# Altium PCB 584689669.PcbDoc
Units mil, origin at the board's own origin, x right, y up, seen from the top; angles counter-clockwise.
Board outline 10050.86 x 1968.36 mil, 2 copper layers (Top Layer, Bottom Layer); 121 components, 55 nets, 447 pads, 141 vias.
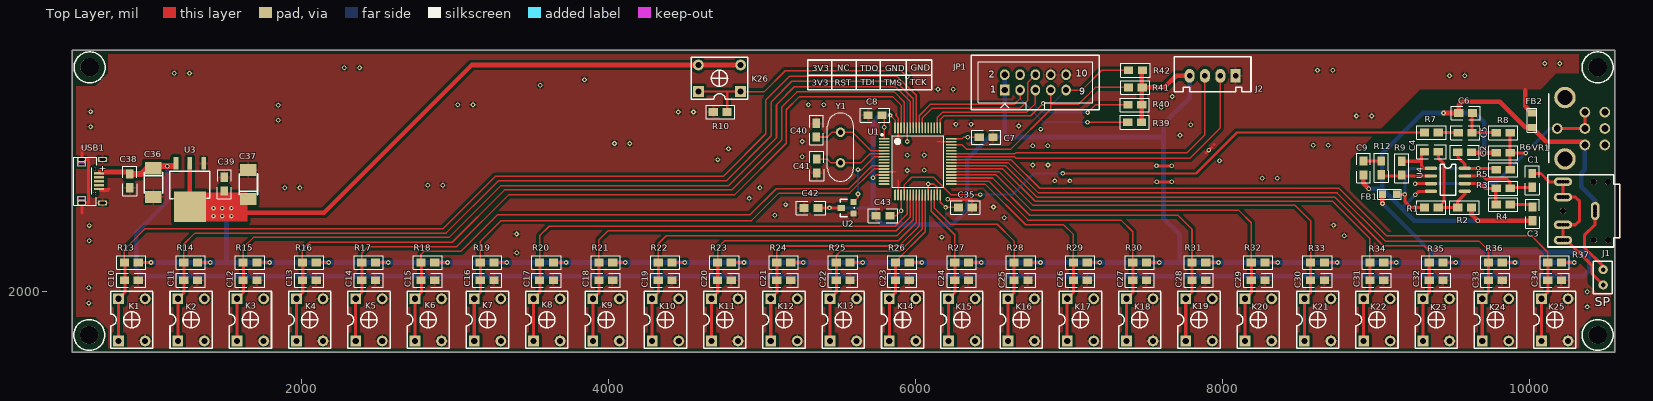
[diagram p0: Top Layer view]
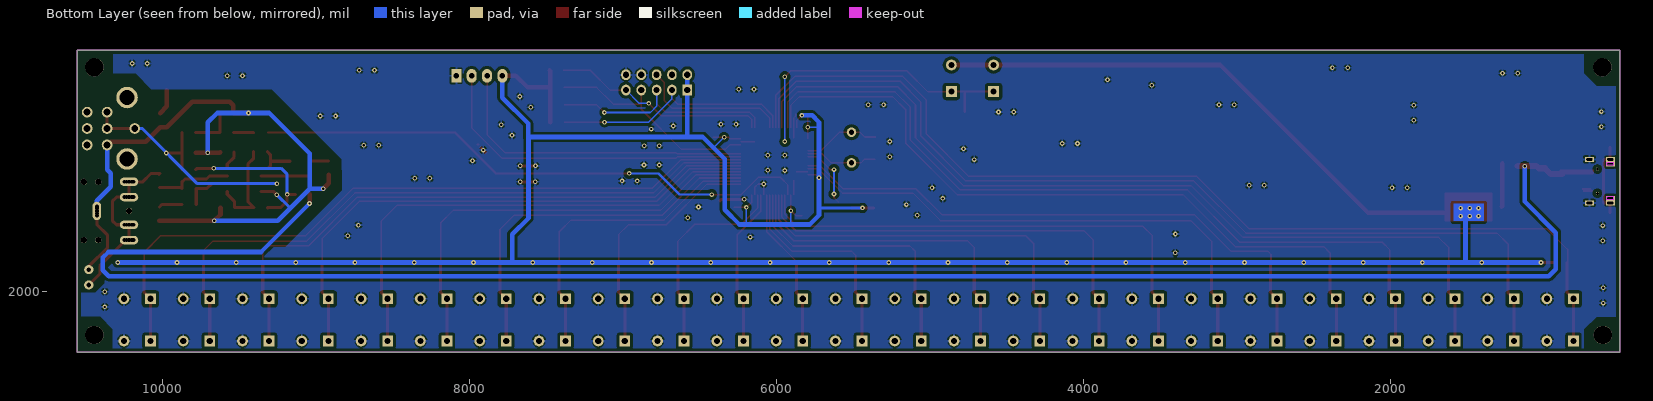
[diagram p1: Bottom Layer view, seen from below]
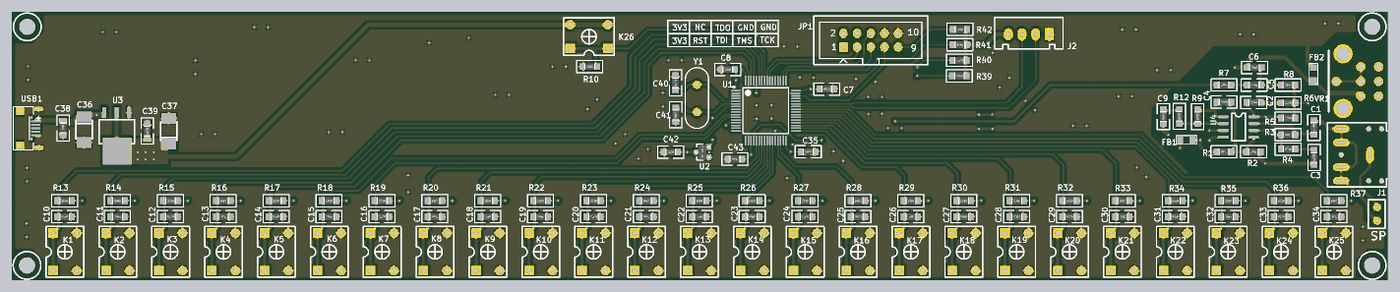
[diagram p2: 3D render of the assembled board from above, using the file's embedded part models]

## Layer stack, top to bottom
Top Solder: solder mask 0.4, Solder Resist, Dk 3.5
Top Layer: signal copper 1.4
Dielectric 1: dielectric 12.6, FR-4, Dk 4.8
Bottom Layer: signal copper 1.4
Bottom Solder: solder mask 0.4, Solder Resist, Dk 3.5

## Board outline
505.89,1606 505.89,3574.36 10556.75,3574.36 10556.75,1606

## Design rules (kind name [scope] priority, off if disabled: settings)
Clearance [All] p1: gap=8 ignorepadtopadclearanceinfootprint=FALSE
HoleSize [All] p1: absolutevalues=TRUE maxlimit=300 minlimit=1 maxpercent=80.000 minpercent=20.000
HoleToHoleClearance [All] p1 off: gap=10 allowstackedmicrovias=TRUE
MinimumSolderMaskSliver [All] p1 off: minsoldermaskwidth=10
PolygonConnect [All] p1: connectstyle=Relief reliefconductorwidth=15 reliefentries=4 polygonreliefangle="90 Angle" airgapwidth=10
RoutingVias [All] p1: holewidth=28 width=50 viastyle="Through Hole" minholewidth=28 minwidth=50 maxholewidth=28 maxwidth=50
SilkToSilkClearance [All] p1 off: silktosilkclearance=10
SilkToSolderMaskClearance [IsPad] p1 off: minsilkscreentomaskgap=10 clearancetoexposedcopper=TRUE
SolderMaskExpansion [All] p1: expansion=4
Width [All] p1: maxlimit=100 minlimit=10 preferedwidth=10
25 further rules are at their usual default settings.

## Classes and differential pairs
component class Sheet-aa: C1 C2 C3 C4 C5 C6 C7 C8 C9 C10 C34 C35 C36 C37 C38 C39 C40 C41 C42 C43 FB1 FB2 J1 J2 JP1 K1 K2 K3 K4 K5 K6 K7 K8 K9 K10 K11 K12 K13 K14 K15 K16 K17 K18 K19 K20 K21 K22 K23 K24 K25 K26 R1 R2 R3 R4 R5 R6 R7 R8 R9 R10 R12 R13 R37 R39 R40 R41 R42 U1 U2 U3 U4 USB1 VR1 Y1

## Components (designator, comment, footprint, x,y, rotation, side; value= is the part's Value field where it differs from the comment)
C1 "1uF" 0805C 10018.75,2771.36 r270 top
C2 "104" 0805C 9623.75,2910.36 r180 top
C3 "104" 0805C 10020.75,2463.36 r90 top
C4 "1uF" 0805C 9406.75,2913.36 r180 top
C5 "1uF" 0805C 9626.75,3037.36 r180 top
C6 "470pF" 0805C 9539.75,3165.36 r0 top
C7 "104" 0805C 6415,3008 r0 top
C8 "104" 0805C 5781,3151 r180 top
C9 "104" 0805C 8918.75,2762.36 r90 top
C10 "104" 0805C 935.02,2075.51 r180 top
C11 "104" 0805C 1321.49,2075.51 r180 top
C12 "104" 0805C 1707.96,2075.51 r180 top
C13 "104" 0805C 2094.42,2075.51 r180 top
C14 "104" 0805C 2480.89,2075.51 r180 top
C15 "104" 0805C 2867.36,2075.51 r180 top
C16 "104" 0805C 3253.82,2075.51 r180 top
C17 "104" 0805C 3640.29,2075.51 r180 top
C18 "104" 0805C 4026.76,2075.51 r180 top
C19 "104" 0805C 4413.22,2075.51 r180 top
C20 "104" 0805C 4799.69,2075.51 r180 top
C21 "104" 0805C 5186.15,2075.51 r180 top
C22 "104" 0805C 5572.62,2075.51 r180 top
C23 "104" 0805C 5959.09,2075.51 r180 top
C24 "104" 0805C 6345.55,2075.51 r180 top
C25 "104" 0805C 6732.02,2075.51 r180 top
C26 "104" 0805C 7118.49,2075.51 r180 top
C27 "104" 0805C 7504.95,2075.51 r180 top
C28 "104" 0805C 7891.42,2075.51 r180 top
C29 "104" 0805C 8277.89,2075.51 r180 top
C30 "104" 0805C 8664.35,2075.51 r180 top
C31 "104" 0805C 9050.82,2075.51 r180 top
C32 "104" 0805C 9437.28,2075.51 r180 top
C33 "104" 0805C 9823.75,2075.51 r180 top
C34 "104" 0805C 10210.22,2075.51 r180 top
C35 "104" 0805C 6279,2550.36 r0 top
C36 "100uF/25V" 1016V 1025.89,2798.59 r90 top
C37 "100uF/25V" 1016V 1658.89,2613.36 r270 top
C38 "104" 0805C 878.89,2768 r270 top
C39 "104" 0805C 1494.89,2657.36 r90 top
C40 "20PF" 0805C 5354,3009.36 r90 top
C41 "20PF" 0805C 5356,2775.36 r90 top
C42 "104" 0805C 5364,2547 r180 top
C43 "104" 0805C 5833,2496 r180 top
FB1 "Res2" 0805 9133.75,2636.36 r180 top value=10UH
FB2 "Res2" 0805 10016.75,3072.36 r90 top value=10UH
J1 "PHONE" SOUND-2 10218.75,2337.36 r0 top
J2 "UART1" 4SIP4 8086,3408 r180 top
JP1 "" JYNJ_10 6581,3315 r180 top
K1 "小方按键" 4KEY-1 806.28,1680 r90 top
K2 "小方按键" 4KEY-1 1192.64,1680 r90 top
K3 "小方按键" 4KEY-1 1579.01,1680 r90 top
K4 "小方按键" 4KEY-1 1965.38,1680 r90 top
K5 "小方按键" 4KEY-1 2351.74,1680 r90 top
K6 "小方按键" 4KEY-1 2738.11,1680 r90 top
K7 "小方按键" 4KEY-1 3124.48,1680 r90 top
K8 "小方按键" 4KEY-1 3510.84,1680 r90 top
K9 "小方按键" 4KEY-1 3897.21,1680 r90 top
K10 "小方按键" 4KEY-1 4283.58,1680 r90 top
K11 "小方按键" 4KEY-1 4669.95,1680 r90 top
K12 "小方按键" 4KEY-1 5056.31,1680 r90 top
K13 "小方按键" 4KEY-1 5442.68,1680 r90 top
K14 "小方按键" 4KEY-1 5829.05,1680 r90 top
K15 "小方按键" 4KEY-1 6215.41,1680 r90 top
K16 "小方按键" 4KEY-1 6601.78,1680 r90 top
K17 "小方按键" 4KEY-1 6988.15,1680 r90 top
K18 "小方按键" 4KEY-1 7374.51,1680 r90 top
K19 "小方按键" 4KEY-1 7760.88,1680 r90 top
K20 "小方按键" 4KEY-1 8147.25,1680 r90 top
K21 "小方按键" 4KEY-1 8533.62,1680 r90 top
K22 "小方按键" 4KEY-1 8919.98,1680 r90 top
K23 "小方按键" 4KEY-1 9306.35,1680 r90 top
K24 "小方按键" 4KEY-1 9692.72,1680 r90 top
K25 "小方按键" 4KEY-1 10079.08,1680 r90 top
K26 "小方按键" 4KEY-1 4860,3305.36 r180 top
R1 "104" 0805R 9405.75,2549.36 r180 top
R2 "104" 0805R 9532.75,2549.36 r0 top
R3 "103" 0805R 9784.75,2674.36 r0 top
R4 "103" 0805R 9874.75,2569.36 r180 top
R5 "104" 0805R 9874.75,2796.36 r180 top
R6 "104" 0805R 9874.75,2906.36 r180 top
R7 "223" 0805R 9316.75,3038.36 r0 top
R8 "1K" 0805R 9784.75,3037.36 r0 top
R9 "103" 0805R 9168.75,2761.36 r90 top
R10 "103" 0805R 4772,3172.36 r180 top
R12 "103" 0805R 9035.75,2853.36 r270 top
R13 "103" 0805R 935.02,2191.77 r180 top
R14 "103" 0805R 1321.49,2191.77 r180 top
R15 "103" 0805R 1707.96,2191.77 r180 top
R16 "103" 0805R 2094.42,2191.77 r180 top
R17 "103" 0805R 2480.89,2191.77 r180 top
R18 "103" 0805R 2867.36,2191.77 r180 top
R19 "103" 0805R 3253.82,2191.77 r180 top
R20 "103" 0805R 3640.29,2191.77 r180 top
R21 "103" 0805R 4026.75,2191.77 r180 top
R22 "103" 0805R 4413.22,2191.77 r180 top
R23 "103" 0805R 4799.69,2191.77 r180 top
R24 "103" 0805R 5186.15,2191.77 r180 top
R25 "103" 0805R 5572.62,2191.77 r180 top
R26 "103" 0805R 5959.09,2191.77 r180 top
R27 "103" 0805R 6345.55,2191.77 r180 top
R28 "103" 0805R 6732.02,2191.77 r180 top
R29 "103" 0805R 7118.49,2191.77 r180 top
R30 "103" 0805R 7504.95,2191.77 r180 top
R31 "103" 0805R 7891.42,2191.77 r180 top
R32 "103" 0805R 8277.89,2191.77 r180 top
R33 "103" 0805R 8664.35,2191.77 r180 top
R34 "103" 0805R 9050.82,2191.77 r180 top
R35 "103" 0805R 9437.28,2191.77 r180 top
R36 "103" 0805R 9823.75,2191.77 r180 top
R37 "103" 0805R 10210.22,2191.77 r180 top
R39 "103" 0805R 7473,3105.36 r180 top
R40 "103" 0805R 7474,3218.36 r180 top
R41 "103" 0805R 7477,3332.36 r180 top
R42 "103" 0805R 7478,3444.36 r180 top
U1 "stm32f051r8t6" LC-LQFP-64_10x10x05P 6014,2850.36 r270 top
U2 "IMP809" SOT23 5595.63,2505.12 r90 top
U3 "AMS1117-3.3" to-252 1361.44,2837.36 r180 top
U4 "LM358" SOP8 9358.75,2805.36 r0 top
USB1 "Micro-USB母座" Micro-USB 585.89,2721.36 r270 top
VR1 "10K" VR8 10359.75,3061.36 r270 top
Y1 "8Mhz" 2XTAL 5511,2840.3 r90 top

## Footprints (in the part's own frame and the unit in brackets; to place one, negate y for a bottom-side part, rotate by r counter-clockwise, add the part's x,y. Pads: shape width x height; smd on the part's side, far side on the other; paste and mask are expansions set on the pad)
2XTAL [mil]
  round 62 hole 35: 1(0.06,0) 2(200.06,0)
  silkscreen extent -120,-85 325,85
4KEY-1 [mil]
  rect 70x70 hole 40: 1(0,0) 1(275,0)
  round 70 hole 40: 2(0,-173) 2(275,-173)
  silkscreen extent -47,-224 323,51
4SIP4 [mil]
  rect 65x90 hole 36: 1(0,0)
  oval 65x90 hole 36: 2(100,0) 3(200,0) 4(300,0)
  silkscreen extent -100,-125 400,105
0805 [mil]
  rect 45x50 smd: 1(0,0) 2(92,0)
  silkscreen extent -31,-32 123,32
0805C [mil] "2.0mmx1.2mm（蒜米工坊）"
  rect 60x50 smd: 1(0,0) 2(90,0)
  silkscreen extent -50,-45 140,45, body extent 5,-25 83,25, height 22
0805R [mil]
  rect 60x50 smd: 1(0,0) 2(90,0)
  silkscreen extent -50,-45 140,45, body extent 5,-25 83,25, height 22
1016V [mil]
  rect 78.74x106 smd: 1(7,-7) 2(-181.23,-7)
  silkscreen extent -156,-67 -18,53
JYNJ_10 [mil]
  rect 62x70 hole 40: 1(0,0)
  oval 62x70 hole 40: 2(0,-100) 3(-100,0) 4(-100,-100) 5(-200,0) 6(-200,-100) 7(-300,0) 8(-300,-100) 9(-400,0) 10(-400,-100)
  silkscreen extent -617,-227 217,127
LC-LQFP-64_10x10x05P [mm]
  oval 0.28x1.8 smd mask+0.051: 1(-3.75,-5.55) 2(-3.25,-5.55) 3(-2.75,-5.55) 4(-2.25,-5.55) 5(-1.75,-5.55) 6(-1.25,-5.55) 7(-0.75,-5.55) 8(-0.25,-5.55) 9(0.25,-5.55) 10(0.75,-5.55) 11(1.25,-5.55) 12(1.75,-5.55) 13(2.25,-5.55) 14(2.75,-5.55) 15(3.25,-5.55) 16(3.75,-5.55) 33(3.75,5.55) 34(3.25,5.55) 35(2.75,5.55) 36(2.25,5.55) 37(1.75,5.55) 38(1.25,5.55) 39(0.75,5.55) 40(0.25,5.55) 41(-0.25,5.55) 42(-0.75,5.55) 43(-1.25,5.55) 44(-1.75,5.55) 45(-2.25,5.55) 46(-2.75,5.55) 47(-3.25,5.55) 48(-3.75,5.55)
  oval 1.8x0.28 smd mask+0.051: 17(5.55,-3.75) 18(5.55,-3.25) 19(5.55,-2.75) 20(5.55,-2.25) 21(5.55,-1.75) 22(5.55,-1.25) 23(5.55,-0.75) 24(5.55,-0.25) 25(5.55,0.25) 26(5.55,0.75) 27(5.55,1.25) 28(5.55,1.75) 29(5.55,2.25) 30(5.55,2.75) 31(5.55,3.25) 32(5.55,3.75) 49(-5.55,3.75) 50(-5.55,3.25) 51(-5.55,2.75) 52(-5.55,2.25) 53(-5.55,1.75) 54(-5.55,1.25) 55(-5.55,0.75) 56(-5.55,0.25) 57(-5.55,-0.25) 58(-5.55,-0.75) 59(-5.55,-1.25) 60(-5.55,-1.75) 61(-5.55,-2.25) 62(-5.55,-2.75) 63(-5.55,-3.25) 64(-5.55,-3.75)
  silkscreen extent -4.55,-6.05 4.25,4.25
Micro-USB [mm]
  rect 0.4x1.7 smd: 1(-1.3,2.35) 2(-0.65,2.35) 3(0,2.35) 4(0.65,2.35) 5(1.3,2.35)
  rect 0.8x1.5 hole 0.4 slot 1 at 90 deg: 6(-3.607,-0.5) 6(-2.825,-0.5) 7(2.825,-0.5) 7(3.607,-0.5) 8(-3.607,2.95) 9(3.607,2.95)
  round 0.5 hole 0.5 unplated: ""(-2,1.65) ""(2,1.65)
  Keep-Out Layer lines w0.127: 3.054,-1.043 2.596,-1.043 2.596,0.075 3.054,0.075 3.054,-1.043 ; -2.596,-1.043 -3.054,-1.043 -3.054,0.075 -2.596,0.075 -2.596,-1.043
  silkscreen extent -4,-1.8 4,1.96
SOP8 [mil]
  oval 80x22 smd: 1(0,0) 2(0,-50) 3(0,-100) 4(0,-150) 5(220,-150) 6(220,-100) 7(220,-50) 8(220,0)
  silkscreen extent 60,-175 160,25
SOT23 [mil]
  rect 40x40 smd: 1(4.88,0.63) 3(79.88,0.63)
  rect 40x50 smd: 2(41.88,80.63)
  silkscreen extent -15,-4 100,86, body extent -15,-11 99,99, height 47
SOUND-2 [mil]
  round 30 hole 25: 1(-30,0) 1(-15,0) 1(0,0) 1(0,0) 1(0,0) 1(0,0) 1(15,0) 1(30,0) 2(-30,100) 2(-15,100) 2(0,100) 2(0,100) 2(0,100) 2(0,100) 2(15,100) 2(30,100) 3(-30,280) 3(-15,280) 3(0,280) 3(0,280) 3(0,280) 3(0,280) 3(15,280) 3(30,280) 4(-30,380) 4(-15,380) 4(0,380) 4(0,380) 4(0,380) 4(0,380) 4(15,380) 4(30,380) 5(210,160) 5(210,175) 5(210,190) 5(210,190) 5(210,190) 5(210,190) 5(210,205) 5(210,220)
  oval 120x55 hole 25: 1(0,0) 2(0,100) 3(0,280) 4(0,380)
  oval 55x120 hole 25: 5(210,190)
  round 40 hole 40: ""(0,190) ""(200,0) ""(200,380) ""(295,0) ""(295,380)
  silkscreen extent -100,-45 370,425
to-252 [mm]
  rect 0.8x2.032 smd: 1(0,0) 2(2.3,0) 3(4.6,0)
  rect 5.3x5 smd: 2(2.261,7.163)
  silkscreen extent -1.02,1.32 5.59,5.82
VR8 [mil]
  round 140 hole 100: 0(-204.83,-128) 0(195.17,-128)
  round 70 hole 45: 1(103.83,2) 2(-109.83,2) 3(-3,2) 3(-3,-178) 4(103.83,132) 5(-109.83,132) 6(-3,132)
  silkscreen extent -230,-233 220,-233

## Part data
C1 C2 C3 C4 C5 C6 C9 C10 C11 C12 C13 C14 C15 C16 C17 C18 C19 C20 C21 C22 C23 C24 C25 C26 C27 C28 C29 C30 C31 C32 C33 C34 C38 C39 C40 C41: library part CAP, "Capacitor"
C7 C8 C35 C42 C43: library part cap, "Capacitor"
C36 C37: library part ELECTRO1, "Electrolytic Capacitor"
FB1 FB2: "Resistor", LatestRevisionDate=17-Jul-2002, LatestRevisionNote="Re-released for DXP Platform.", PackageReference=AXIAL-0.4, Published=8-Jun-2000, Publisher="Altium Limited"
J1: library part "PHONEJACK STEREO SW"
J2: library part CON4, "Connector"
JP1: library part "HEADER 5X2"
K1 K2 K3 K4 K5 K6 K7 K8 K9 K10 K11 K12 K13 K14 K15 K16 K17 K18 K19 K20 K21 K22 K23 K24 K25 K26: library part SW-PB, "小方按键6*6"
R1 R2 R3 R4 R5 R6 R9 R12 R13 R14 R15 R16 R17 R18 R19 R20 R21 R22 R23 R24 R25 R26 R27 R28 R29 R30 R31 R32 R33 R34 R35 R36 R37 R39 R40 R41 R42: library part RES1, "直插电阻"
R7 R8 R10: library part RES2
U1: library part STM32F105RB_1, "32位STM单片机", BOM名称=32位STM单片机, 学习资源=www.ooocke.com, 版权归属=源创客
U3: library part LM1117
U4: library part LM139
USB1: library part CON9, "Connector"
VR1: library part "RESISTOR VAR", Bottom=20, Right=40
Y1: library part CRYSTAL, "Crystal"

## Free pads (board coordinates)
  round 120 hole 120: 1(615.59,1719) 1(617.86,3463.36) 1(10444.75,1719) 1(10444.75,3463.36)
  round 60 hole 30: 2(10481,2145) 3(10481,2045)

## Via types
v1: diameter 30, hole 15, Top Layer to Bottom Layer, tented both sides, 141 vias

## Nets (pads, with @x,y where several pads share a name; then routed paths per layer and width w, separated by ;. In a path a pad name is that pad's centre, name@x,y a point inside that pad or via, vN(x,y) a via of type N, cw(c..) or ccw(c..) an arc to the next point about the centre after c; other vN are vias at no path point)
A_GND: C2.1 C3.1 C6.1 C9.1 FB2.1 J1.5 pad.2 R2.2 R6.2 U4.4 VR1.1 | length 5011
  Top Layer w20: v1(9255.75,2633) 9278.11,2655.36 U4.4 ; J1.5@10428.75,2512.36 10428.75,2497.36 10428.75,2438.75 10358,2368 10358,2289 10481,2166 pad.2
  Top Layer w30: C9.1 8918.75,2708 v1(8953.75,2673) ; v1(9440.39,3165.36) C6.1 9539.75,3216 9563.75,3240 9805.75,3240 9973.39,3072.36 FB2.1 10111.11,2978 10341.28,2978 VR1.1 ; R2.2 9622.75,2504 v1(9663.39,2463.36) C3.1 ; C2.1 9627.75,2906.36 v1(9705.75,2906.36) R6.2
  Bottom Layer w20: 9166.25,2547.5 9170.25,2547.5 v1(9255.75,2633)
  Bottom Layer w30: v1(8953.75,2673) 9040.75,2673 ; v1(9663.39,2463.36) 9250.39,2463.36 9166.25,2547.5 9040.75,2673 ; v1(9705.75,2906.36) 9705.75,3104.25 9644.64,3165.36 v1(9440.39,3165.36) 9304.11,3165.36 9040.75,2902 9040.75,2673 ; VR1.1 10361.75,2797 10337.75,2773 10337.75,2686 10428.75,2595 10428.75,2557.36 10428.75,2542.36 J1.5@10428.75,2527.36
D+: USB1.3
D-: USB1.2
GND: C7.2 C8.2 C10.1 C11.1 C12.1 C13.1 C14.1 C15.1 C16.1 C17.1 C18.1 C19.1 C20.1 C21.1 C22.1 C23.1 C24.1 C25.1 C26.1 C27.1 C28.1 C29.1 C30.1 C31.1 C32.1 C33.1 C34.1 C35.2 C36.2 C37.2 C38.2 C39.2 C40.2 C41.1 C42.2 C43.2 FB2.2 J2.1 JP1.8 JP1.10 K1.2 K2.2 K3.2 K4.2 K5.2 K6.2 K7.2 K8.2 K9.2 K10.2 K11.2 K12.2 K13.2 K14.2 K15.2 K16.2 K17.2 K18.2 K19.2 K20.2 K21.2 K22.2 K23.2 K24.2 K25.2 R10.2 U1.12 U1.18 U1.28 U1.31 U1.47 U1.63 U2.1 U3.1 USB1.5 USB1.6 USB1.7 USB1.8 USB1.9 | length 1800.7
  Top Layer w10: U1.12 5870.46,2781.46 ; 5875,3161 5875,3147.05 5886.05,3136 U1.63 5886.05,3002.05 ; U1.18 5886.05,2727.95 ; U1.28 6082.9,2702.9 v1(6083,2703) 6120,2703 6141.95,2681.05 U1.31 ; 6142.31,2978.32 U1.47
  Top Layer w15: 685.88,2660.4 689.28,2657 739.89,2657 ; USB1.5@694.89,2671 745.5,2671
  Top Layer w20: 568.89,2515 568.89,2580.64 609.33,2580.64 609.33,2850.07 ; 568.89,2944 568.89,2862.08 611.89,2862.08 ; v1(6209,2603) 6359,2603 6368,2594 ; v1(7570,2821) v1(7669,2821) ; v1(7571,2717) v1(7670,2717) ; 7894.49,2907.5 v1(7911,2924) v1@7912.99,2926 ; v1@7911,2928 v1@7912.99,2926 ; 7927.5,2940.51 v1@7912.99,2926 ; 7946,2959.01 7946,2961
  Top Layer w30: 9972.75,3315 9972.75,3208.36 FB2.2
  other v1: 10377,1902 613.15,1927 10377,2001 613.15,2026 3401,2254 615.89,2333 6170,2357 8794,2365 3400,2377 615.89,2432 8724,2435 6578,2483 5083,2499 6508,2553 5153,2569 4916,2609 1889.15,2679 1988.15,2679 4986,2679 2821,2694 2920,2694 6907,2723 7006,2723 8259,2740 8358,2740 5946,2791 6056,2792 6764,2827 6863,2827 7981,2854 4711,2862 5262,2881 5946,2890 6056,2891 4781,2932 6763,2952 6862,2952 8591,2955 8690,2955 4038,2967 4137,2967 5262,2980 7723,3020 6815,3061 624.15,3076 6673,3081 7793,3090 6263,3093 6362,3093 1847.15,3118 8873,3146 8972,3146 4454,3172 4553,3172 624.15,3175 7602,3203 1847.15,3217 3017,3219 3116,3219 5302,3219 5401,3219 7672,3273 6146,3320 6245,3320 3554,3347 3843,3383 9479.75,3409 9578.75,3409 1170,3425 1269,3425 8619,3444 8718,3444 2278,3460 2377,3460 10099.75,3488 10198.75,3488
KEY1: C10.2 K1.1 R13.2 U1.57 | length 6632.4
  Top Layer w10: R13.2 845.02,2276.87 979.15,2411 2920,2411 3263,2754 4748,2754 5024,3030 5024,3251 5177,3404 5881,3404 6004.16,3280.84 U1.57
  Top Layer w20: K1.1@806.28,1680 806.28,1955 847.41,1996.13 R13.2@847.41,2191.77
KEY2: C11.2 K2.1 R14.2 U1.58 | length 6206.3
  Top Layer w10: R14.2 1231.49,2310.49 1304,2383 2941,2383 3281,2723 4766,2723 5060,3017 5060,3238 5194,3372 5871,3372 5984.47,3258.53 U1.58
  Top Layer w20: K2.1@1192.64,1680 1192.64,1955 1233.78,1996.13 R14.2@1233.78,2191.77
KEY3: C12.2 K3.1 R15.2 U1.59 | length 5744.1
  Top Layer w10: R15.2 1617.96,2287.96 1685,2355 2960,2355 3298,2693 4783,2693 5094,3004 5094,3220 5210,3336 5870,3336 5964.79,3241.21 U1.59
  Top Layer w20: K3.1@1579.01,1680 1579.01,1955 1620.14,1996.13 R15.2@1620.14,2191.77
KEY4: C13.2 K4.1 R16.2 U1.61 | length 5282
  Top Layer w10: R16.2 2004.42,2275.42 2053,2324 2981,2324 3321,2664 4803,2664 5127,2988 5127,3203 5227,3303 5862,3303 5925.42,3239.58 U1.61
  Top Layer w20: K4.1@1965.38,1680 1965.38,1955 2006.51,1996.13 R16.2@2006.51,2191.77
KEY5: C14.2 K5.1 R17.2 U1.62 | length 4825.9
  Top Layer w10: R17.2 2390.89,2251.89 2434,2295 3011,2295 3348,2632 4821,2632 5158,2969 5158,3187 5244,3273 5850,3273 5905.73,3217.27 U1.62
  Top Layer w20: K5.1@2351.74,1680 2351.74,1955 2392.88,1996.13 R17.2@2392.88,2191.77
KEY6: C15.2 K6.1 R18.2 U1.10 | length 3838.3
  Top Layer w10: R18.2 2777.36,2244.36 2797,2264 3038,2264 3276,2502 4922,2502 5092,2672 5566,2672 5714.83,2820.83 U1.10
  Top Layer w20: K6.1@2738.11,1680 2738.11,1955 2779.24,1996.13 R18.2@2779.24,2191.77
KEY7: C16.2 K7.1 R19.2 U1.11 | length 3493.2
  Top Layer w10: R19.2 3163.82,2328.82 3300,2465 4931,2465 5110,2644 5570,2644 5727.15,2801.15 U1.11
  Top Layer w20: K7.1@3124.48,1680 3124.48,1955 3165.61,1996.13 R19.2@3165.61,2191.77
KEY8: C17.2 K8.1 R20.2 U1.21 | length 3281.2
  Top Layer w10: R20.2 3550.29,2365.29 3613,2428 5867,2428 5945.1,2506.1 U1.21
  Top Layer w20: K8.1@3510.84,1680 3510.84,1955 3551.98,1996.13 R20.2@3551.98,2191.77
KEY9: C18.2 K9.1 R21.2 U1.22 | length 2909.6
  Top Layer w10: R21.2 3936.75,2339.75 3996,2399 5875,2399 5964.79,2488.79 U1.22
  Top Layer w20: K9.1@3897.21,1680 3897.21,1955 3938.35,1996.13 R21.2@3938.35,2191.77
KEY10: C19.2 K10.1 R22.2 U1.23 | length 2538.6
  Top Layer w10: R22.2 4323.22,2314.22 4375,2366 5880,2366 5984.47,2470.47 U1.23
  Top Layer w20: K10.1@4283.58,1680 4283.58,1955 4324.71,1996.13 R22.2@4324.71,2191.77
KEY11: C20.2 K11.1 R23.2 U1.24 | length 2168.2
  Top Layer w10: R23.2 4709.69,2287.69 4755,2333 5887,2333 6004.16,2450.16 U1.24
  Top Layer w20: K11.1@4669.95,1680 4669.95,1955 4711.08,1996.13 R23.2@4711.08,2191.77
KEY12: C21.2 K12.1 R24.2 U1.25 | length 1800.1
  Top Layer w10: R24.2 5096.15,2265.15 5130,2299 5893,2299 6023.84,2429.84 U1.25
  Top Layer w20: K12.1@5056.31,1680 5056.31,1955 5097.45,1996.13 R24.2@5097.45,2191.77
KEY13: C22.2 K13.1 R25.2 U1.26 | length 1429.1
  Top Layer w10: R25.2 5482.62,2237.62 5511,2266 5900,2266 6043.53,2409.53 U1.26
  Top Layer w20: K13.1@5442.68,1680 5442.68,1955 5483.81,1996.13 R25.2@5483.81,2191.77
KEY14: C23.2 K14.1 R26.2 U1.27 | length 1047.7
  Top Layer w10: R26.2@5866.43,2194.43 6063.21,2391.21 U1.27
  Top Layer w20: K14.1@5829.05,1680 5829.05,1955 5870.18,1996.13 R26.2@5870.18,2191.77
KEY15: C24.2 K15.1 R27.2 U1.29 | length 1032.3
  Top Layer w10: U1.29 6102.58,2525.42 6255.55,2372.45 R27.2
  Top Layer w20: K15.1@6215.41,1680 6215.41,1955 6256.55,1996.13 R27.2@6256.55,2191.77
KEY16: C25.2 K16.1 R28.2 U1.30 | length 1362.3
  Top Layer w10: U1.30 6122.27,2546.73 6228,2441 6532,2441 6642.02,2330.98 R28.2
  Top Layer w20: K16.1@6601.78,1680 6601.78,1955 6642.91,1996.13 R28.2@6642.91,2191.77
KEY17: C26.2 K17.1 R29.2 U1.33 | length 1643.5
  Top Layer w10: U1.33 6453.28,2702.72 6718,2438 6965,2438 7028.49,2374.51 R29.2
  Top Layer w20: K17.1@6988.15,1680 6988.15,1955 7029.28,1996.13 R29.2@7029.28,2191.77
KEY18: C27.2 K18.1 R30.2 U1.34 | length 2048.4
  Top Layer w10: U1.34 6477.59,2722.41 6732,2468 7339,2468 7414.95,2392.05 R30.2
  Top Layer w20: K18.1@7374.51,1680 7374.51,1955 7415.65,1996.13 R30.2@7415.65,2191.77
KEY19: C28.2 K19.1 R31.2 U1.35 | length 2452.7
  Top Layer w10: U1.35 6501.91,2742.09 6744,2500 7710,2500 7801.42,2408.58 R31.2
  Top Layer w20: K19.1@7760.88,1680 7760.88,1955 7802.02,1996.13 R31.2@7802.02,2191.77
KEY20: C29.2 K20.1 R32.2 U1.36 | length 2871.6
  Top Layer w10: U1.36 6525.22,2761.78 6756,2531 8107,2531 8187.89,2450.11 R32.2
  Top Layer w20: K20.1@8147.25,1680 8147.25,1955 8188.38,1996.13 R32.2@8188.38,2191.77
KEY21: C30.2 K21.1 R33.2 U1.37 | length 3274.2
  Top Layer w10: U1.37 6546.54,2781.46 6765,2563 8475,2563 8574.35,2463.65 R33.2
  Top Layer w20: K21.1@8533.62,1680 8533.62,1955 8574.75,1996.13 R33.2@8574.75,2191.77
KEY22: C31.2 K22.1 R34.2 U1.38 | length 3600
  Top Layer w10: U1.38 6568.85,2801.15 6780,2590 8717,2590 8960.82,2346.18 R34.2
  Top Layer w20: K22.1@8919.98,1680 8919.98,1955 8961.12,1996.13 R34.2@8961.12,2191.77
KEY23: C32.2 K23.1 R35.2 U1.39 | length 3949.2
  Top Layer w10: U1.39 6587.17,2820.83 6790,2618 8731,2618 9048,2301 9315,2301 9347.28,2268.72 R35.2
  Top Layer w20: K23.1@9306.35,1680 9306.35,1955 9347.48,1996.13 R35.2@9347.48,2191.77
KEY24: C33.2 K24.1 R36.2 U1.40 | length 4344.2
  Top Layer w10: U1.40 6605.48,2840.52 6801,2645 8747,2645 9061,2331 9672,2331 9733.75,2269.25 R36.2
  Top Layer w20: K24.1@9692.72,1680 9692.72,1955 9733.85,1996.13 R36.2@9733.85,2191.77
KEY25: C34.2 K25.1 R37.2 U1.41 | length 4732.7
  Top Layer w10: U1.41 6623.8,2860.2 6809,2675 8759,2675 9069,2365 10014,2365 10120.22,2258.78 R37.2
  Top Layer w20: K25.1@10079.08,1680 10079.08,1955 10120.22,1996.13 R37.2
MUSIC: R7.1 U1.20 | length 3687.7
  Top Layer w10: U1.20 5925.42,2696.42 5976,2747 6117,2747 6230,2634 v1(6422,2634)
  Top Layer w15: v1@6958,2772 v1(6960,2772) 7828,2772 8095,3039 R7.1@9311,3039
  Bottom Layer w15: v1(6422,2634) 6631,2634 6769,2772 v1(6960,2772)
NetC1_2: C1.2 R3.2 U4.7 | length 500.3
  Top Layer w20: U4.7 9694.39,2755.36 9713.75,2736 9853.75,2736 9874.75,2715 R3.2 9881.75,2681.36 C1.2
NetC3_2: C3.2 R4.1 | length 152.6
  Top Layer w20: R4.1 10004.75,2569.36 C3.2
NetC4_1: C4.1 R1.1 R2.1 U4.5 | length 647.1
  Top Layer w20: C4.1 9406.75,2871 9443.75,2834 9443.75,2587.36 R1.1 R2.1 9532.75,2590 9578.75,2636 U4.5
NetC4_2: C4.2 R9.2 U4.1 | length 297.9
  Top Layer w20: R9.2 9296.39,2851.36 9297.75,2850 ; C4.2 9297.75,2894.36 9297.75,2850 ; U4.1 9312.39,2805.36 9297.75,2820 9297.75,2850
NetC5_1: C5.1 C6.2 R8.1 | length 287.2
  Top Layer w20: C6.2 9626.75,3162.36 C5.1 R8.1
NetC5_2: C5.2 R7.2 | length 130.4
  Top Layer w20: R7.2 9407.75,3037.36 C5.2
NetC9_2: C9.2 R12.1 | length 117.4
  Top Layer w20: C9.2 8919.75,2853.36 R12.1
NetC40_1: C40.1 U1.5 Y1.2 | length 504.5
  Top Layer w10: C40.1 5424.36,3009.36 5455.36,3040.36 Y1.2 5588.64,3040.36 5709.74,2919.26 U1.5
NetC41_2: C41.2 U1.6 Y1.1 | length 474.4
  Top Layer w10: C41.2 5424.64,2865.36 5449.64,2840.36 Y1.1 5643.36,2840.36 5702.57,2899.57 U1.6
NetK26_1: K26.1 R10.1 U1.60 | length 2076.6
  Top Layer w10: K26.1@4860,3305.36 5015.36,3305.36 5151,3441 5906.2,3441 v1(5945.1,3402.1) ; v1(5945.1,2979.9) U1.60
  Top Layer w15: K26.1@4585,3305.36 4772,3305.36 ; R10.1 4772,3305.36 ; K26.1@4860,3305.36 4772,3305.36
  Bottom Layer w10: v1(5945.1,2979.9) v1(5945.1,3402.1)
NetR3_1: R3.1 R4.2 U4.6 | length 322.7
  Top Layer w20: U4.6 9679.39,2705.36 9710.39,2674.36 9782.75,2674.36 9780.75,2672.36 R4.2@9780.75,2569.36
NetR5_1: R5.1 R6.1 R8.2 U4.3 VR1.2 VR1.3 | length 1808.4
  Top Layer w20: v1(9255.11,2705.36) U4.3 ; R5.1 R6.1 ; R8.2 R6.1 ; v1(9975.75,2905) 9974.39,2906.36 R6.1 ; VR1.3@10181.75,3064.36 10361.75,3064.36 VR1.2
  Bottom Layer w20: v1(9255.11,2705.36) 9773.75,2705.36 10132.75,3064.36 VR1.3@10181.75,3064.36
NetR9_1: R9.1 R12.2 U4.2 | length 326.3
  Top Layer w20: R12.2 9043.75,2755.36 U4.2
nRST: U1.7 U2.3 | length 429.3
  Top Layer w10: U2.3 5625,2615 v1(5625,2638) ; v1(5625,2797) 5650,2797 5732.89,2879.89 U1.7
  Bottom Layer w10: v1(5625,2638) v1(5625,2797)
nTRST: JP1.3 R39.2 U1.56 | length 1659.2
  Top Layer w10: U1.56 6023.84,3147.84 6098,3222 6643,3222 6681,3260 JP1.3 ; v1(7120.64,3105.36) R39.2
  Bottom Layer w10: JP1.3 6681,3259 6834.64,3105.36 v1(7120.64,3105.36)
"OUT R": C1.1 J1.1 J1.2 J1.3 J1.4 pad.3 | length 1216.8
  Top Layer w20: C1.1@10023.75,2766.36 C1.1 10075.64,2771.36 10129.64,2717.36 10188.75,2717.36 10203.75,2717.36 10218.75,2717.36 10219.75,2718.36 10219.75,2618.36 10233.77,2617.88 10248.75,2617.36 10300.39,2617.36 10327.75,2590 10327.75,2464 10301.11,2437.36 10248.75,2437.36 10233.75,2437.36 10218.75,2422.36 J1.1@10218.75,2337.36 ; J1.1@10203.75,2337.36 J1.1@10218.75,2337.36 ; pad.3 10409,2117 10409,2170 10251.69,2327.31 10238.69,2327.31 10228.64,2337.36 J1.1@10218.75,2337.36
TCK: JP1.9 R42.2 U1.49 | length 1413.4
  Top Layer w10: U1.49 6161.64,3122.64 6186,3147 6751,3147 v1(6832,3228) ; JP1.9 7084,3315 7213.36,3444.36 R42.2
  Bottom Layer w10: v1(6832,3228) 6894,3228 JP1.9
TDI: JP1.5 R40.2 U1.50 | length 1577.3
  Top Layer w10: U1.50 6141.95,3135.95 6178,3172 6725,3172 6781,3228 JP1.5 ; v1(7121,3169) 7170.36,3218.36 R40.2
  Bottom Layer w10: JP1.5 6781,3209 6821,3169 v1(7121,3169)
TDO: JP1.6 U1.55 | length 987.3
  Top Layer w10: U1.55 6043.53,3132.53 6109,3198 6682,3198 6731,3247 6731,3365 JP1.6
TMS: JP1.7 R41.2 U1.46 | length 1446.4
  Top Layer w10: U1.46 6303.37,2958.63 6334,2928 6619,2928 6881,3190 6881,3222 ; JP1.7 6881,3222 ; R41.2 7172.36,3332.36 7062,3222 6881,3222
UART1_RXD: J2.2 U1.42 | length 2178.8
  Top Layer w10: U1.42 6645.11,2879.89 6654,2871 7789,2871 7986,3068 J2.2
UART1_TXD: J2.3 U1.43 | length 2089
  Top Layer w10: U1.43 6647.57,2899.57 6656,2908 7770,2908 7886,3024 J2.3
VCC3V: C7.1 C8.1 C35.1 C37.1 C39.1 C42.1 C43.1 J2.4 JP1.1 JP1.2 K26.2 R13.1 R14.1 R15.1 R16.1 R17.1 R18.1 R19.1 R20.1 R21.1 R22.1 R23.1 R24.1 R25.1 R26.1 R27.1 R28.1 R29.1 R30.1 R31.1 R32.1 R33.1 R34.1 R35.1 R36.1 R37.1 R39.1 R40.1 R41.1 R42.1 U1.1 U1.13 U1.19 U1.32 U1.48 U1.64 U2.2 U3.2 | length 22757.2
  Top Layer w10: v1(5723,2743) 5741.78,2761.78 U1.13 ; C8.1 5795.5,3136.5 U1.1 ; C43.1 5873,2496 v1(5905.73,2528.73) U1.19 ; v1@5835,3151 5866.36,3119.64 U1.64 ; U1.32 6161.64,2584.36 v1(6195.64,2550.36) C35.1 ; U1.48 6303,2998 6313,3008 v1(6341,3008) C7.1
  Top Layer w20: R13.1 v1(1017.5,2191.77) ; R14.1 v1(1403.97,2191.77) ; R15.1 v1(1790.44,2191.77) ; R16.1 v1(2176.9,2191.77) ; R17.1 v1(2563.37,2191.77) ; R18.1 v1(2949.84,2191.77) ; R19.1 v1(3336.3,2191.77) ; R20.1 v1(3722.77,2191.77) ; R21.1 v1(4109.24,2191.77) ; R22.1 v1(4495.7,2191.77) ; R23.1 v1(4882.17,2191.77) ; R24.1 v1(5268.63,2191.77) ; C42.1 v1(5439.5,2547) U2.2 ; R25.1 v1(5655.1,2191.77) ; R26.1 v1(6041.57,2191.77) ; R27.1 v1(6428.03,2191.77) ; R28.1 v1(6814.5,2191.77) ; R29.1 v1(7200.97,2191.77) ; R30.1 v1(7587.43,2191.77) ; R31.1 v1(7973.9,2191.77) ; R32.1 v1(8360.37,2191.77) ; R33.1 v1(8746.83,2191.77) ; R34.1 v1(9133.3,2191.77) ; R35.1 v1(9519.76,2191.77) ; R36.1 v1(9906.23,2191.77) ; R37.1 v1(10292.7,2191.77)
  Top Layer w30: U3.2@1270.89,2837.36 1270.89,2556.91 U3.2@1272.44,2555.36 ; 1602,2515 2145,2515 3108.36,3478.36 4585,3478.36 K26.2@4860,3478.36 ; R39.1 7473,3439.36 R42.1 ; R41.1 7622.36,3332.36 7698,3408 J2.4
  Bottom Layer w10: 5725,3073 v1(5796,3073) ; 5902,2439 5905.73,2442.73 v1(5905.73,2528.73) ; v1(6195.64,2550.36) 6195.64,2439.36 6196,2439 ; v1(6341,3008) 6408.5,2940.5 6408.5,2937.5
  Bottom Layer w20: v1(5439.5,2547) 5720,2547 5723,2544
  Bottom Layer w30: v1(1017.5,2191.77) v1(1403.97,2191.77) 1510,2191.77 ; 1510,2480 1510,2191.77 ; v1(5834,3150) 5768,3150 5723,3105 v1(5723,2743) 5723,2544 5723,2500 5784,2439 5902,2439 6196,2439 6241,2439 6337,2535 6337,2866 6408.5,2937.5 6480,3009 7616,3009 ; 6581,3011 JP1.2 ; J2.4 7786,3265 7618,3097 7618,3007 7616,3009 ; v1(9906.23,2191.77) v1(9519.76,2191.77) v1(9133.3,2191.77) v1(8746.83,2191.77) v1(8360.37,2191.77) v1(7973.9,2191.77) 7722,2191.77 ; v1@9914.43,2191.77 v1(10292.7,2191.77) ; 1510,2191.77 v1(1790.44,2191.77) v1(2176.9,2191.77) v1(2563.37,2191.77) v1(2949.84,2191.77) v1(3336.3,2191.77) v1(3722.77,2191.77) v1(4109.24,2191.77) v1(4495.7,2191.77) v1(4882.17,2191.77) v1(5268.63,2191.77) v1(5655.1,2191.77) v1(6041.57,2191.77) v1(6428.03,2191.77) v1(6814.5,2191.77) v1(7200.97,2191.77) v1(7587.43,2191.77) 7722,2191.77 ; 7616,3009 7616,2481 7722,2375 7722,2191.77
  other v1: 1424.89,2494 1481.89,2494 1541.89,2494 1424.89,2546 1481.89,2546 1541.89,2546
VCC5: C2.2 FB1.1 R1.2 R5.2 U4.8 | length 1203.8
  Top Layer w20: FB1.1@9134.75,2635.36 v1@9188.75,2635.36 ; v1(9188.75,2635) 9188.75,2590 9229.39,2549.36 R1.2 R1.2@9314.75,2548.36 ; C2.2 9533.75,2878 9578.75,2833 U4.8 9775.75,2805.36 R5.2
  Bottom Layer w20: v1(9188.75,2635) 9188.75,2766 9227.75,2805 v1(9667.75,2805)
VCC5V: C36.1 C38.1 FB1.2 U3.3 USB1.1 | length 12412.1
  Top Layer w10: C38.1@866.35,2772.54 C38.1@878.89,2760
  Top Layer w15: USB1.1 C38.1@866.35,2772.54
  Top Layer w30: FB1.2 9041.75,2577 v1(9042.75,2576)
  Top Layer w40: C38.1 954.89,2768 992.48,2805.59 C36.1 1047.3,2820 U3.3@1169.89,2820
  Bottom Layer w30: v1(1123.89,2819) 1123.89,2588.74 921.15,2386 921.15,2148 967.15,2102 10350,2102 10389,2141 10389,2224 10353,2260 9358.75,2260 v1(9042.75,2576)
pads on no net: J1. JP1.4 U1.2 U1.3 U1.4 U1.8 U1.9 U1.14 U1.15 U1.16 U1.17 U1.44 U1.45 U1.51 U1.52 U1.53 U1.54 USB1. USB1.4 VR1.0 VR1.4 VR1.5 VR1.6

## Polygon pours and split planes (outlines as drawn)
GND on Top Layer "Bottom Layer-No Net" (solid, remove dead copper, pour order 2): 505.89,3574.36 505.89,1606 10556.75,1606 10556.75,3574.36
GND on Bottom Layer "Bottom Layer-No Net" (solid, remove dead copper, pour order 0): 505.89,3574.36 505.89,1606 10556.75,1606 10556.75,3574.36

## Keep-outs
Keep-Out Layer:
  the board outline again, w10

## Other copper
Top Layer:
  rectangle net VCC5V: 670.89,2772.54 896.89,2797
  rectangle net VCC3V: 1332.89,2458 1647.89,2648
  pour cut-out: 10556.75,2292 10556,2291.25 10556,1994 10439,1994 10378,2055 10378,2137 10220.82,2294.18
  pour cut-out: 8830.75,2720 8830.75,2663 9201.75,2292 10556.75,2292 10556.75,3357 10489.39,3424.36 10176.11,3424.36 10073.75,3322 9288.75,3322 8831.75,2865
  pour cut-out: 10556.75,1606 10323.75,1606 10323.75,1757 10406.75,1840 10556.75,1840
  pour cut-out: 10556.75,3574.36 10556.75,3341.36 10405.75,3341.36 10322.75,3424.36 10322.75,3574.36
  pour cut-out: 504.86,3574.36 737.86,3574.36 737.86,3423.36 654.86,3340.36 504.86,3340.36
  pour cut-out: 504.86,1606 504.86,1839 655.86,1839 738.86,1756 738.86,1606
Bottom Layer:
  rectangle net VCC3V: 1387.89,2461 1587.89,2575
  pour cut-out: 10556.75,2292 10556,2291.25 10556,1994 10439,1994 10378,2055 10378,2137 10220.82,2294.18
  pour cut-out: 8830.75,2720 8830.75,2663 9201.75,2292 10556.75,2292 10556.75,3357 10489.39,3424.36 10176.11,3424.36 10073.75,3322 9288.75,3322 8831.75,2865
  pour cut-out: 504.86,1606 504.86,1839 655.86,1839 738.86,1756 738.86,1606
  pour cut-out: 10556.75,1606 10323.75,1606 10323.75,1757 10406.75,1840 10556.75,1840
  pour cut-out: 10556.75,3574.36 10556.75,3341.36 10405.75,3341.36 10322.75,3424.36 10322.75,3574.36
  pour cut-out: 504.86,3574.36 737.86,3574.36 737.86,3423.36 654.86,3340.36 504.86,3340.36

## Silkscreen, mask and mechanical layers (free items; w line width, h text height)
Top Overlay:
  circle w10: c10444.75,1719 r101
  circle w10: c615.59,1719 r101
  circle w10: c617.86,3463.36 r101
  circle w10: c10444.75,3463.36 r101
  lines w10: 5297,3412 6105,3412 ; 5455,3318 5455,3511 ; 5613,3318 5613,3511 ; 5771,3318 5771,3511 ; 5938,3318 5938,3511 ; 10539,2198 10539,1989 10415,1989 10415,2199 10539,2199 ; 5297,3318 6105,3318 6105,3511 5297,3511 5297,3318
  text "NC" at 5489,3442 h40
  text "GND" at 5969,3442 h40
  text "3V3" at 5326,3439 h40
  text "GND" at 5802,3439 h40
  text "TDO" at 5641,3437 h40
  text "TCK" at 5967,3348 h40
  text "TDI" at 5644,3347 h40
  text "RST" at 5475,3344 h40
  text "TMS" at 5796,3344 h40
  text "3V3" at 5325,3342 h40
  text "SP" at 10425,1906 h60

## Text inside footprints (layer, text, board x,y; h text height)
JP1: Top Overlay "1" at 6488,3296 h45; Top Overlay "2" at 6478,3395 h45; Top Overlay "9" at 7068,3286 h45; Top Overlay "10" at 7044,3403 h45
USB1: Top Overlay "+" at 683.89,2824.36 h39.37 r270